# Altium PCB fuse_board.PcbDoc
Units mil, origin at the board's own origin, x right, y up, seen from the top; angles counter-clockwise.
Board outline 5300 x 2200 mil, 2 copper layers (Top Layer, Bottom Layer); 46 components, 21 nets, 130 pads, 10 vias.
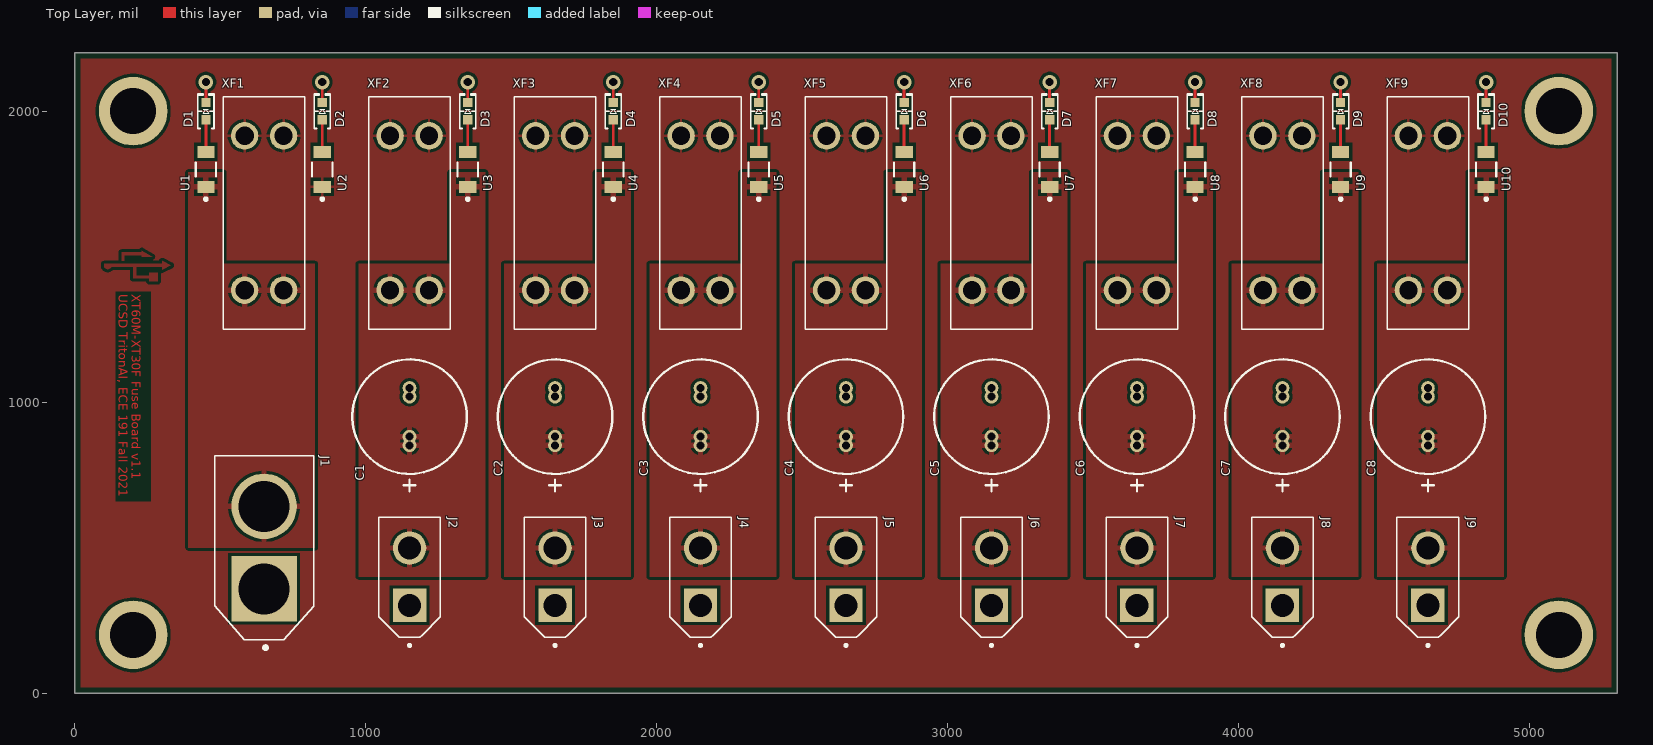
[diagram p0: Top Layer view]
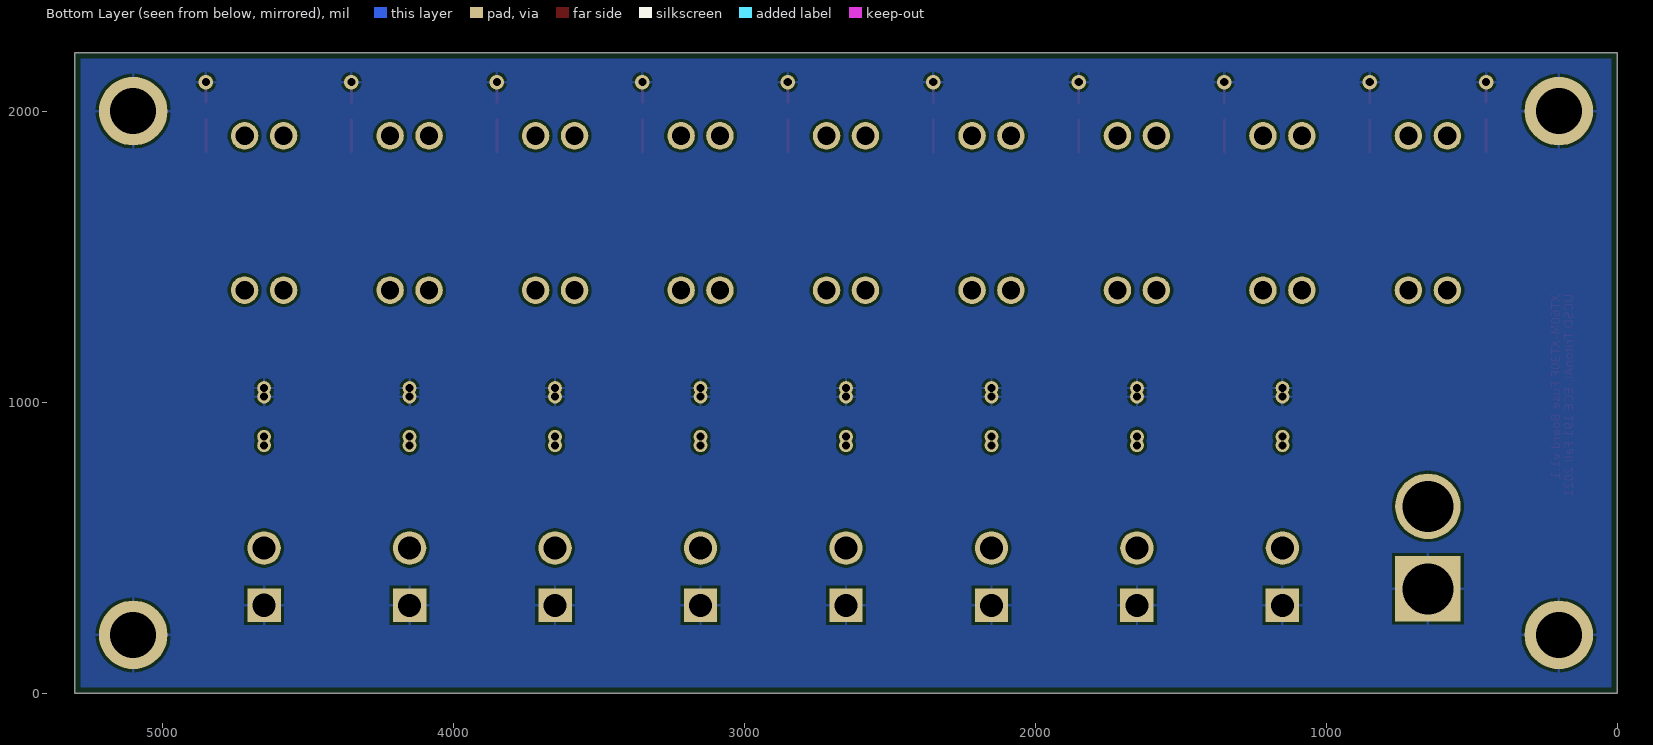
[diagram p1: Bottom Layer view, seen from below]

## Layer stack, top to bottom
Top Solder: solder mask 0.4, Solder Resist, Dk 3.5
Top Layer: signal copper 1.4
Dielectric 1: dielectric 12.6, FR-4, Dk 4.8
Bottom Layer: signal copper 1.4
Bottom Solder: solder mask 0.4, Solder Resist, Dk 3.5

## Board outline
0,0 5300,0 5300,2200 0,2200

## Design rules (kind name [scope] priority, off if disabled: settings)
Clearance [All] p1: gap=10 ignorepadtopadclearanceinfootprint=FALSE except(0: Arc-Hole Track-Hole SMDPad-Hole THPad-Hole Via-Hole Fill-Hole Poly-Hole Region-Hole Text-Hole)
PolygonConnect [All] p1: connectstyle=Relief reliefconductorwidth=10 reliefentries=4 polygonreliefangle="90 Angle" airgapwidth=10
RoutingVias [All] p1: holewidth=28 width=50 viastyle="Through Hole" minholewidth=28 minwidth=50 maxholewidth=28 maxwidth=50
SolderMaskExpansion [All] p1: expansion=4 istentingtop=FALSE
Width [All] p1: maxlimit=50 minlimit=10 preferedwidth=10
30 further rules are at their usual default settings.

## Components (designator, comment, footprint, x,y, rotation, side; value= is the part's Value field where it differs from the comment)
C1 "Capacitor Generic" RADIAL_CAP_10mm 1150,950 r270 top
C2 "Capacitor Generic" RADIAL_CAP_10mm 1650,950 r270 top
C3 "Capacitor Generic" RADIAL_CAP_10mm 2150,950 r270 top
C4 "Capacitor Generic" RADIAL_CAP_10mm 2650,950 r270 top
C5 "Capacitor Generic" RADIAL_CAP_10mm 3150,950 r270 top
C6 "Capacitor Generic" RADIAL_CAP_10mm 3650,950 r270 top
C7 "Capacitor Generic" RADIAL_CAP_10mm 4150,950 r270 top
C8 "Capacitor Generic" RADIAL_CAP_10mm 4650,950 r270 top
D1 "Green" "LED 0603_1608 GREEN" 450,2000 r90 top
D2 "Red" "LED 0603_1608 RED" 850,2000 r90 top
D3 "Red" "LED 0603_1608 RED" 1350,2000 r90 top
D4 "Red" "LED 0603_1608 RED" 1850,2000 r90 top
D5 "Red" "LED 0603_1608 RED" 2350,2000 r90 top
D6 "Red" "LED 0603_1608 RED" 2850,2000 r90 top
D7 "Red" "LED 0603_1608 RED" 3350,2000 r90 top
D8 "Red" "LED 0603_1608 RED" 3850,2000 r90 top
D9 "Red" "LED 0603_1608 RED" 4350,2000 r90 top
D10 "Red" "LED 0603_1608 RED" 4850,2000 r90 top
J1 "XT60-M" AMASS_XT60-M 650,500 r90 top
J2 "XT30U-F" AMASS_XT30-M#1 1150,400 r90 top
J3 "XT30U-F" AMASS_XT30-M#1 1650,400 r90 top
J4 "XT30U-F" AMASS_XT30-M#1 2150,400 r90 top
J5 "XT30U-F" AMASS_XT30-M#1 2650,400 r90 top
J6 "XT30U-F" AMASS_XT30-M#1 3150,400 r90 top
J7 "XT30U-F" AMASS_XT30-M#1 3650,400 r90 top
J8 "XT30U-F" AMASS_XT30-M#1 4150,400 r90 top
J9 "XT30U-F" AMASS_XT30-M#2 4650,400 r90 top
U1 "AL5809-15P1-7" DIOD-POWERDI123-2_B_V 450,1800 r90 top
U2 "AL5809-15P1-7" DIOD-POWERDI123-2_B_V 850,1800 r90 top
U3 "AL5809-15P1-7" DIOD-POWERDI123-2_B_V 1350,1800 r90 top
U4 "AL5809-15P1-7" DIOD-POWERDI123-2_B_V 1850,1800 r90 top
U5 "AL5809-15P1-7" DIOD-POWERDI123-2_B_V 2350,1800 r90 top
U6 "AL5809-15P1-7" DIOD-POWERDI123-2_B_V 2850,1800 r90 top
U7 "AL5809-15P1-7" DIOD-POWERDI123-2_B_V 3350,1800 r90 top
U8 "AL5809-15P1-7" DIOD-POWERDI123-2_B_V 3850,1800 r90 top
U9 "AL5809-15P1-7" DIOD-POWERDI123-2_B_V 4350,1800 r90 top
U10 "AL5809-15P1-7" DIOD-POWERDI123-2_B_V 4850,1800 r90 top
XF1 "3557-2" FUSE_3557-2 650,1650 r90 top
XF2 "3557-2" FUSE_3557-2 1150,1650 r270 top
XF3 "3557-2" FUSE_3557-2 1650,1650 r270 top
XF4 "3557-2" FUSE_3557-2 2150,1650 r270 top
XF5 "3557-2" FUSE_3557-2 2650,1650 r270 top
XF6 "3557-2" FUSE_3557-2 3150,1650 r270 top
XF7 "3557-2" FUSE_3557-2 3650,1650 r270 top
XF8 "3557-2" FUSE_3557-2 4150,1650 r270 top
XF9 "3557-2" FUSE_3557-2 4650,1650 r270 top

## Footprints (in the part's own frame and the unit in brackets; to place one, negate y for a bottom-side part, rotate by r counter-clockwise, add the part's x,y. Pads: shape width x height; smd on the part's side, far side on the other; paste and mask are expansions set on the pad)
AMASS_XT30-M#1 [mil]
  rect 115x115 hole 78.74: 1(-98.43,0)
  round 115 hole 78.74: 2(98.43,0)
  silkscreen extent -240,-106 205,106, body extent -200,-100 200,100, height 370
AMASS_XT30-M#2 [mil]
  rect 115x115 hole 80: 1(-98.43,0)
  round 115 hole 80: 2(98.43,0)
  silkscreen extent -240,-106 205,106, body extent -200,-100 200,100, height 370
AMASS_XT60-M [mm]
  rect 5.715x5.715 hole 4.445: 1(-3.6,0)
  round 5.715 hole 4.445: 2(3.6,0)
  silkscreen extent -8.89,-4.32 8,4.32, body extent -7.75,-4.05 7.75,4.05, height 16
DIOD-POWERDI123-2_B_V [mm] "SOD, 2-Leads, Body 2.8x1.78mm"
  rect 1.05x1.5 smd: 1(-1.525,0) 2(1.525,0)
  silkscreen extent -2.72,-0.89 0.6,0.89, body extent -1.4,-0.89 1.4,0.89, height 1.01
FUSE_3557-2 [mm]
  round 2.4 hole 1.6: 1(-6.735,-1.7) 1(-6.735,1.7) 2(6.735,-1.7) 2(6.735,1.7)
  silkscreen extent -10.16,-3.56 10.16,3.56, body extent -9.91,-3.38 9.91,3.38, height 7.4
"LED 0603_1608 GREEN" [mm] "Chip Diode, 2-Leads, Body 1.60x0.80mm, IPC Medium Density"
  rect 0.8x0.8 smd: 1(-0.75,0) 2(0.75,0)
  silkscreen extent -1.52,-0.7 1.52,0.7, body extent -0.8,-0.4 0.8,0.4, height 0.53
"LED 0603_1608 RED" [mm] "Chip Diode, 2-Leads, Body 1.60x0.80mm, IPC Medium Density"
  rect 0.8x0.8 smd: 1(-0.75,0) 2(0.75,0)
  silkscreen extent -1.52,-0.7 1.52,0.7, body extent -0.8,-0.4 0.8,0.4, height 0.53
RADIAL_CAP_10mm [mm]
  round 1.2 hole 0.7: 1(-2.5,0) 1(-1.75,0) 2(1.75,0) 2(2.5,0)
  silkscreen extent -5,-5 6.51,5

## Part data
C1 C2 C3 C4 C5 C6 C7 C8: "Cap Radial Aluminum Cylindrical Can 3.5mm, 5mm, 7.5mm", Package="RADIAL-2 Panasonic", Availability="In Stock", Check_prices=https://www.snapeda.com/parts/ECA-2WHG220/Panasonic/view-part/390097/?ref=eda, MF=Panasonic, MP=ECA-2WHG220, Price=None, SnapEDA_Link=https://www.snapeda.com/parts/ECA-2WHG220/Panasonic/view-part/390097/?ref=snap
D1: library part LTST-C193TGKT-5A, "LED GREEN CLEAR CHIP SMD", Current - Test=5mA, Device Package="0603 (1608 Metric)", Lens Color=Colorless, Manufacturer="Lite-On Inc.", Millicandela Rating=154mcd, Supplier Device Package="Chip LED", Supplier Part Number 1=160-1832-1-ND, Voltage - Forward (Vf) (Typ)=2.8V, Color=Green, ComponentLink1Description=Datasheet, ComponentLink1URL=//media.digikey.com/pdf/Data%20Sheets/Lite-On%20PDFs/LTST-C193TGKT-5A.pdf, ComponentLink2Description="DigiKey Link", ComponentLink2URL=http://digikey.com/product-detail/en/lite-on-inc/LTST-C193TGKT-5A/160-1832-1-ND/2356255, Configuration=Standard, Height (Max)=0.45mm, LastUpdated="9/2/2020 1:20:42 AM", Lens Size="1.15mm x 0.80mm", Lens Style="Rectangle with Flat Top", Lens Transparency=Clear, Lifecycle Status=Active, Minimum Order=1, Mounting Type="Surface Mount", Package / Case="0603 (1608 Metric)", Packaging=TapeAndReel, Part Number=LTST-C193TGKT-5A, Part Status=Active, PartId=644, Price=0.10, Series=-, Size / Dimension="1.60mm L x 0.80mm W", Supplier 1=DigiKey, Viewing Angle=130°, Wavelength - Dominant=528nm, Wavelength - Peak=525nm
D2 D3 D4 D5 D6 D7 D8 D9 D10: library part 19-217/R6C-AL1M2VY/3T, "LED RED CLEAR 2SMD", Current - Test=5mA, Device Package="0603 (1608 Metric)", Lens Color=Colorless, Manufacturer="Everlight Electronics Co Ltd", Supplier Device Package=2-SMD, Supplier Part Number 1=1080-1585-1-ND, Voltage - Forward (Vf) (Typ)=1.95V, Color=Red, ComponentLink1Description=Datasheet, ComponentLink1URL=//media.digikey.com/pdf/Data%20Sheets/Everlight%20PDFs/19-217-R6C-AL1M2VY-3T.pdf, ComponentLink2Description="DigiKey Link", ComponentLink2URL=http://digikey.com/product-detail/en/everlight-electronics-co-ltd/19-217-R6C-AL1M2VY-3T/1080-1585-1-ND/8535308, Configuration=Standard, Height (Max)=0.50mm, LastUpdated="9/2/2020 1:20:56 AM", Lens Size="1.00mm x 0.80mm", Lens Style="Rectangle with Flat Top", Lens Transparency=Clear, Lifecycle Status=Active, Minimum Order=1, Mounting Type="Surface Mount", Package / Case="0603 (1608 Metric)", Packaging=TapeAndReel, Part Number=19-217/R6C-AL1M2VY/3T, Part Status=Active, PartId=419, Price=0.05, Series=-, Size / Dimension="1.60mm L x 0.80mm W", Supplier 1=DigiKey, Viewing Angle=120°, Wavelength - Peak=632nm
J1: "Plug; DC supply; XT60; male; PIN: 2; for cable; soldered; 30A; 500V", Package="Package Analog Devices", Availability=Unavailable, MF=AMASS, MP=XT60-M, Price=None, SnapEDA_Link=https://www.snapeda.com/parts/XT60-M/AMASS/view-part/2883912/?ref=snap
J2 J3 J4 J5 J6 J7 J8 J9: "Plug; DC supply; XT30; female; PIN: 2; for cable; soldering; 15A", Package="Package Analog Devices", Availability=Unavailable, MF=AMASS, MP=XT60-M, Price=None, SnapEDA_Link=https://www.snapeda.com/parts/XT60-M/AMASS/view-part/2883912/?ref=snap
U1 U2 U3 U4 U5 U6 U7 U8 U9 U10: library part CMP-2100-00289-1, "Constant Current LED Driver, 2.5 to 60 V, -40 to 125 degC, 2-Pin SMD, RoHS, Tape and Reel"
XF1 XF2 XF3 XF4 XF5 XF6 XF7 XF8 XF9: "Fuse Block 30A 500V 1 Circuit Blade Through Hole", Package="Nonstandard Keystone", Availability=Unavailable, MF="Keystone Electronics", MP=3557-2, Price=None, SnapEDA_Link=https://www.snapeda.com/parts/3557-2/Keystone%20Electronics/view-part/278060/?ref=snap

## Free pads (board coordinates)
  round 236.22 hole 157.48: ""(200,200) ""(200,2000) ""(5100,200) ""(5100,2000)

## Via types
v1: diameter 50, hole 28, Top Layer to Bottom Layer, 10 vias

## Nets (pads, with @x,y where several pads share a name; then routed paths per layer and width w, separated by ;. In a path a pad name is that pad's centre, name@x,y a point inside that pad or via, vN(x,y) a via of type N, cw(c..) or ccw(c..) an arc to the next point about the centre after c; other vN are vias at no path point)
GND: C1.1 C2.1 C3.1 C4.1 C5.1 C6.1 C7.1 C8.1 D1.2 D2.2 D3.2 D4.2 D5.2 D6.2 D7.2 D8.2 D9.2 D10.2 J1.1 J2.1 J3.1 J4.1 J5.1 J6.1 J7.1 J8.1 J9.1 pad. | length 704.7
  Top Layer w10: D1.2 v1(450,2100) ; D2.2 v1(850,2100) ; D3.2 v1(1350,2100) ; D4.2 v1(1850,2100) ; D5.2 v1(2350,2100) ; D6.2 v1(2850,2100) ; D7.2 v1(3350,2100) ; D8.2 v1(3850,2100) ; D9.2 v1(4350,2100) ; D10.2 v1(4850,2100)
NetD1_1: D1.1 U1.2 | length 110.4
  Top Layer w10: U1.2 D1.1
NetD2_1: D2.1 U2.2 | length 110.4
  Top Layer w10: U2.2 D2.1
NetD3_1: D3.1 U3.2 | length 110.4
  Top Layer w10: U3.2 D3.1
NetD4_1: D4.1 U4.2 | length 110.4
  Top Layer w10: U4.2 D4.1
NetD5_1: D5.1 U5.2 | length 110.4
  Top Layer w10: U5.2 D5.1
NetD6_1: D6.1 U6.2 | length 110.4
  Top Layer w10: U6.2 D6.1
NetD7_1: D7.1 U7.2 | length 110.4
  Top Layer w10: U7.2 D7.1
NetD8_1: D8.1 U8.2 | length 110.4
  Top Layer w10: U8.2 D8.1
NetD9_1: D9.1 U9.2 | length 110.4
  Top Layer w10: U9.2 D9.1
NetD10_1: D10.1 U10.2 | length 110.4
  Top Layer w10: U10.2 D10.1
OUT1: C1.2 J2.2 U3.1 XF2.2
OUT2: C2.2 J3.2 U4.1 XF3.2
OUT3: C3.2 J4.2 U5.1 XF4.2
OUT4: C4.2 J5.2 U6.1 XF5.2
OUT5: C5.2 J6.2 U7.1 XF6.2
OUT6: C6.2 J7.2 U8.1 XF7.2
OUT7: C7.2 J8.2 U9.1 XF8.2
OUT8: C8.2 J9.2 U10.1 XF9.2
VCC: U2.1 XF1.2 XF2.1 XF3.1 XF4.1 XF5.1 XF6.1 XF7.1 XF8.1 XF9.1
VIN: J1.2 U1.1 XF1.1

## Polygon pours and split planes (outlines as drawn)
no net on Top Layer "NONET_L01_P077" (solid, pour order 77): 100,1465 ccw(c112.5,1470.88) 125,1465 200,1465 200,1425 255,1425 255,1415 285,1415 285,1445 255,1445 255,1435 210,1435 210,1465 300,1465 300,1455 330,1470 300,1485 300,1475 100,1475
no net on Top Layer "NONET_L01_P078" (solid, pour order 78): 160,1485 170,1485 170,1505 230,1505 230,1500 265,1500 230,1520 230,1515 160,1515
OUT8 on Top Layer "OUT8_L01_P074" (solid, pour order 74): 4790,1475 4790,1790 4910,1790 4910,400 4475,400 4475,1475
OUT7 on Top Layer "OUT7_L01_P073" (solid, pour order 73): 4290,1475 4290,1790 4410,1790 4410,400 3975,400 3975,1475
OUT6 on Top Layer "OUT6_L01_P072" (solid, pour order 72): 3790,1475 3790,1790 3910,1790 3910,400 3475,400 3475,1475
OUT5 on Top Layer "OUT5_L01_P071" (solid, pour order 71): 3290,1475 3290,1790 3410,1790 3410,400 2975,400 2975,1475
OUT4 on Top Layer "OUT4_L01_P070" (solid, pour order 70): 2790,1475 2790,1790 2910,1790 2910,400 2475,400 2475,1475
OUT3 on Top Layer "OUT3_L01_P069" (solid, pour order 69): 2290,1475 2290,1790 2410,1790 2410,400 1975,400 1975,1475
OUT2 on Top Layer "OUT2_L01_P068" (solid, pour order 68): 1790,1475 1790,1790 1910,1790 1910,400 1475,400 1475,1475
VCC on Top Layer "VCC_L01_P075" (solid, pour order 75): 20,2180.01 20,20 5280,20 5280,2179.98
OUT1 on Top Layer "OUT1_L01_P067" (solid, pour order 67): 1290,1475 1290,1790 1410,1790 1410,400 975,400 975,1475
VIN on Top Layer "VIN_L01_P066" (solid, pour order 66): 390,1790 510,1790 510,1475 825,1475 825,500 390,500
no net on Top Solder "NONET_L01_P083" (solid, pour order 83): 100,1465 ccw(c112.5,1470.88) 125,1465 200,1465 200,1425 255,1425 255,1415 285,1415 285,1445 255,1445 255,1435 210,1435 210,1465 300,1465 300,1455 330,1470 300,1485 300,1475 100,1475
no net on Top Solder "NONET_L01_P084" (solid, pour order 84): 160,1485 170,1485 170,1505 230,1505 230,1500 265,1500 230,1520 230,1515 160,1515
GND on Bottom Layer "GND_L02_P076" (solid, pour order 76): 5280,20 5280,2180 20,2180 20,20

## Other copper
Top Layer:
  text "XT60M-XT30F Fuse Board v1.1 / UCSD TritonAI, ECE 191 Fall 2021" at 150,1370 h30 r270

## Silkscreen, mask and mechanical layers (free items; w line width, h text height)
Top Solder:
  text "XT60M-XT30F Fuse Board v1.1 / UCSD TritonAI, ECE 191 Fall 2021" at 150,1370 h30 r270